# EAGLE board power (EAGLE 6.4)
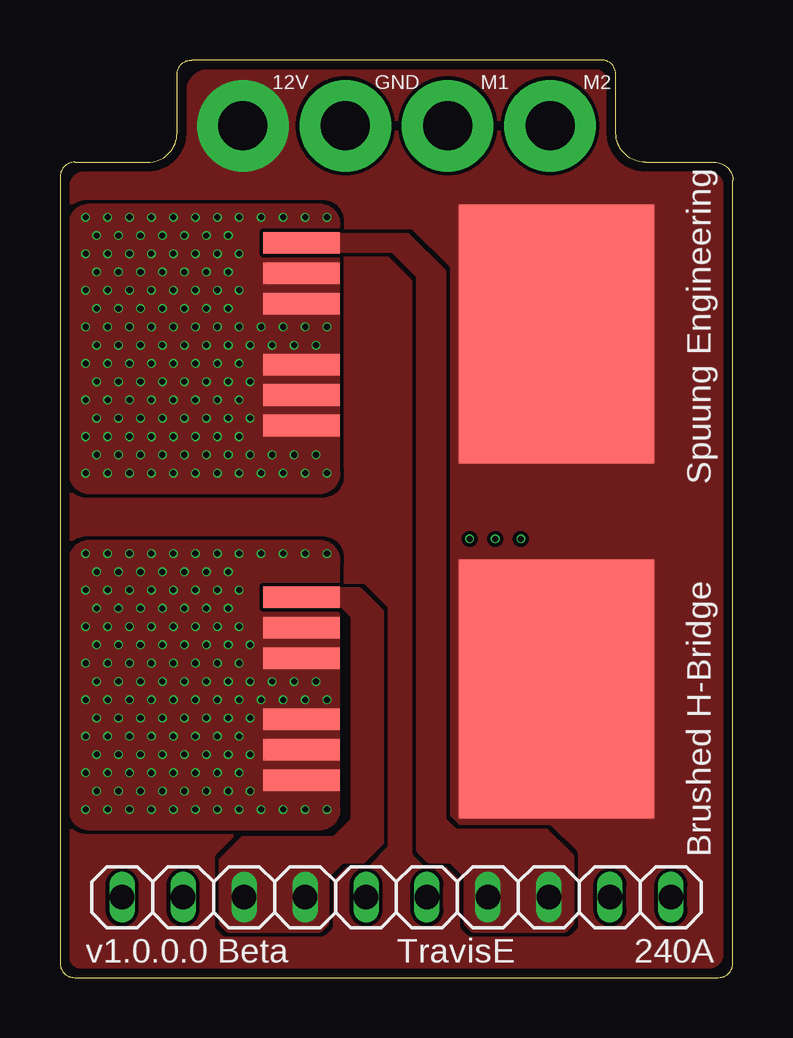
[diagram p0: board, top side]
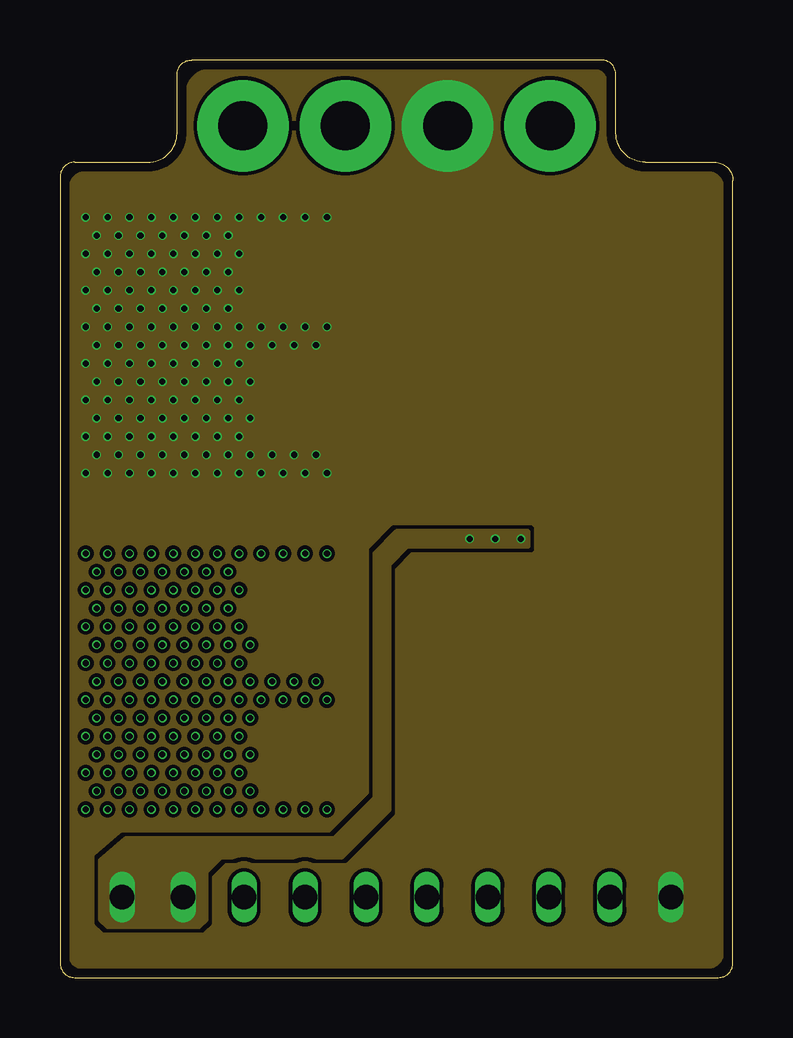
[diagram p1: board, inner layer Route2]
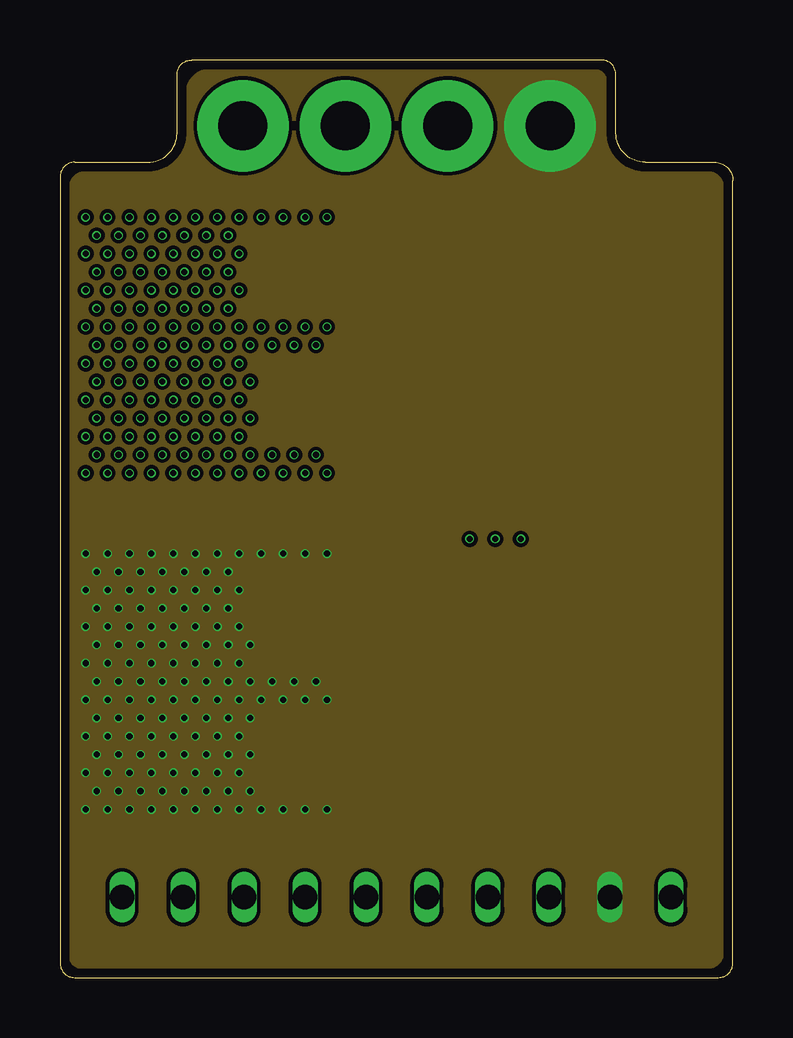
[diagram p2: board, inner layer Route3]
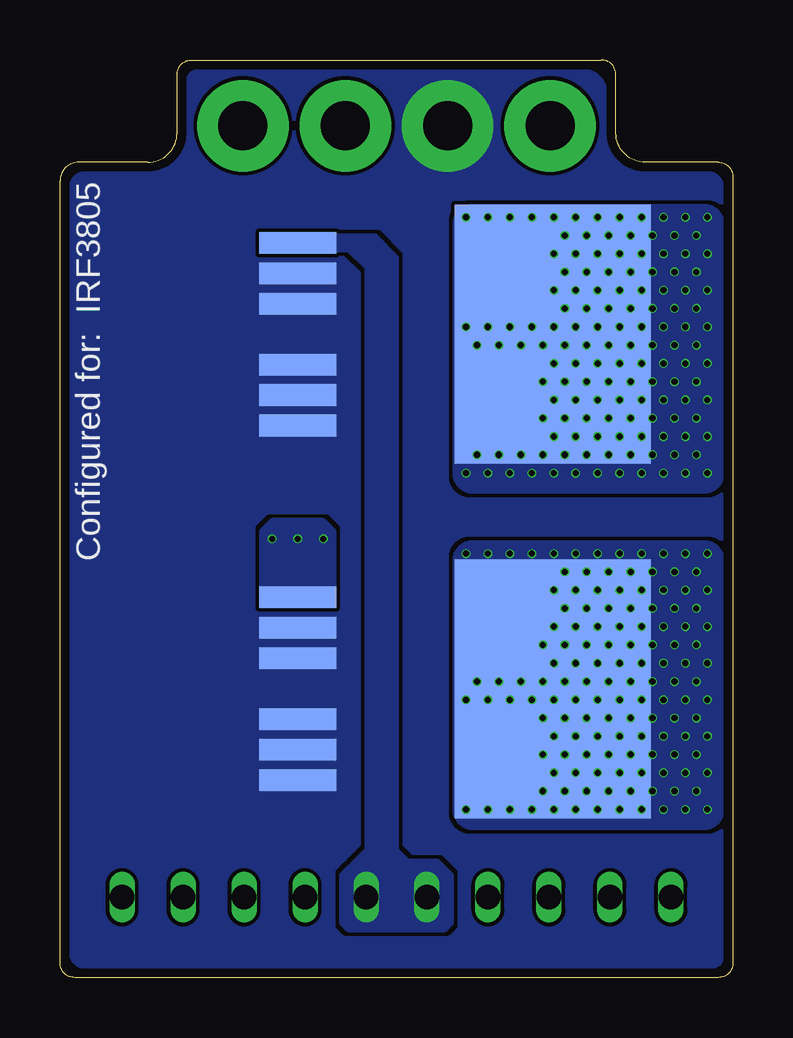
[diagram p3: board, bottom side, seen from below]

Size 28.04 x 38.25 mm. Coordinates in mm from the lower left corner, seen from the top.
Outline: 0.61,0 27.43,0 arc90 28.04,0.61 28.04,33.22 arc90 27.28,33.99 24.38,33.99 arc-90 23.17,35.2 23.17,37.64 arc90 22.56,38.25 5.49,38.25 arc90 4.88,37.64 4.88,35.2 arc-90 3.66,33.99 0.61,33.99 arc90 0,33.38 0,0.61 arc90 0.61,0
Copper layers (1*2*3*16): Top 0.035559375mm / dielectric 0.17018125mm / Route2 0.01778125mm / dielectric 47mil / Route3 0.01778125mm / dielectric 0.17018125mm / Bottom 0.035559375mm
Design rules "LaenPCBOrder *": minimum track width 5mil, minimum drill 10mil, track to track 6mil, track to pad 6mil, pad to pad 6mil, via to via 6mil, smd to smd 6mil, copper to edge 15mil, drill to drill 6mil, minimum pad ring 1mil, minimum via ring 1mil, stop-mask expansion 4mil, vias tented up to drill 13mil, thermal gap 10mil

## Footprints (pad centres in the part's own frame; a part is rotated, then mirrored left to right if it is on the bottom)
1X10 = drill 1.016 long: 1 -11.43,0; 2 -8.89,0; 3 -6.35,0; 4 -3.81,0; 5 -1.27,0; 6 1.27,0; 7 3.81,0; 8 6.35,0; 9 8.89,0; 10 11.43,0
D2PAK-7 = smd 0.9 x 3.2: 1 -3.81,0; 2 -2.54,0; 3 -1.27,0; 5 1.27,0; 6 2.54,0; 7 3.81,0 | smd 10.8 x 8.15: 8 0,10.625

## Placement (x,y rotation side)
JP1  [1X10]  14.02,3.35 0 top
U$1  IRF3805STRL-7PP  [D2PAK-7]  10.06,26.82 270 top
U$2  IRF3805STRL-7PP  [D2PAK-7]  10.06,12.04 270 top
U$3  IRF3805STRL-7PP  [D2PAK-7]  18.14,26.82 270 bottom
U$4  IRF3805STRL-7PP  [D2PAK-7]  18.14,12.04 270 bottom

## Library data of the parts
JP1 = pinhead-1
U$1-U$4 = ir-mosfets

## Nets
12V: U$1.8 U$2.8
GND: U$3.2 U$3.3 U$3.5 U$3.6 U$3.7 U$4.2 U$4.3 U$4.5 U$4.6 U$4.7
HO1: JP1.7 JP1.8 U$1.1
HO2: JP1.3 JP1.4 U$2.1
LO1: JP1.5 JP1.6 U$3.1
LO2: JP1.1 JP1.2 U$4.1
M1: JP1.10 U$1.2 U$1.3 U$1.5 U$1.6 U$1.7 U$3.8
M2: JP1.9 U$2.2 U$2.3 U$2.5 U$2.6 U$2.7 U$4.8

## Tracks (layer width: path | path; a pad name or v marks a point on that pad's centre or on a via)
12V  (via drill 2.03 pad 3.81)
  other vias: 7.62,35.51
  pour Top (rank 6, no thermals): 22.25,37.8 6.25,37.8 arc90 5.33,36.88 5.33,35.36 arc-90 3.51,33.53 1.07,33.53 arc90 0.46,32.92 0.46,0.91 arc90 0.91,0.46 26.97,0.46 arc90 27.58,1.07 27.58,32.92 arc90 26.97,33.53 24.38,33.53 arc-90 22.71,35.2 22.71,37.34 arc90
GND  (via drill 2.03 pad 3.81)
  other vias: 11.89,35.51
  pour Bottom (rank 6, no thermals): 22.25,37.8 6.25,37.8 arc90 5.33,36.88 5.33,35.36 arc-90 3.51,33.53 1.07,33.53 arc90 0.46,32.92 0.46,0.91 arc90 0.91,0.46 26.97,0.46 arc90 27.58,1.07 27.58,32.92 arc90 26.97,33.53 24.38,33.53 arc-90 22.71,35.2 22.71,37.34 arc90
HO1
  pour Top (rank 5, no thermals): 21.34,3.51 21.34,5.03 20.27,6.1 16.46,6.1 16,6.55 16,29.41 14.48,30.94 8.69,30.94 8.69,30.33 13.87,30.33 14.94,29.26 14.94,5.33 15.39,4.88 16.31,4.88 16.92,4.27 16.92,2.29 17.22,1.98 21.03,1.98 21.34,2.29
HO2
  pour Top (rank 4, no thermals): 8.69,15.54 11.73,15.54 12.19,15.09 12.19,6.55 11.43,5.79 7.62,5.79 6.71,4.88 6.71,2.29 7.01,1.98 10.82,1.98 11.13,2.29 11.13,4.27 11.73,4.88 12.65,4.88 13.41,5.64 13.41,15.24 12.5,16.15 8.69,16.15
LO1
  pour Bottom (rank 5, no thermals): 13.87,1.98 16,1.98 16.31,2.29 16.31,4.27 16,4.57 15.85,4.72 15.24,5.33 15.24,29.57 16,30.33 19.51,30.33 19.51,30.94 14.94,30.94 14.02,30.02 14.02,5.33 13.56,4.88 12.34,4.88 11.73,4.27 11.73,2.29 12.04,1.98
LO2  (via drill 0.25 pad 0.36)
  other vias: 17.07,18.29 18.14,18.29 19.2,18.29
  pour Route2 (isolate 0.61, rank 5, no thermals): 19.51,18.59 14.02,18.59 13.11,17.68 13.11,7.47 11.43,5.79 2.74,5.79 1.68,4.88 1.68,2.44 1.98,2.13 5.79,2.13 6.1,2.44 6.1,4.42 6.71,5.03 11.73,5.03 13.72,7.01 13.72,17.22 14.48,17.98 19.51,17.98
  pour Bottom (rank 5, no thermals): 16.61,15.54 16.61,18.59 17.07,19.05 19.2,19.05 19.66,18.59 19.66,15.54
M1  (via drill 0.25 pad 0.36, 2.03 pad 3.81)
  other vias: 16.15,35.51 1.07,31.7 1.98,31.7 2.9,31.7 3.81,31.7 4.72,31.7 5.64,31.7 6.55,31.7 7.47,31.7 8.38,31.7 9.3,31.7 10.21,31.7 11.13,31.7 1.52,30.94 2.44,30.94 3.35,30.94 4.27,30.94 5.18,30.94 6.1,30.94 7.01,30.94 1.07,30.18 1.98,30.18 2.9,30.18 3.81,30.18 4.72,30.18 5.64,30.18 6.55,30.18 7.47,30.18 1.52,21.79 2.44,21.79 3.35,21.79 4.27,21.79 5.18,21.79 6.1,21.79 7.01,21.79 1.07,21.03 1.98,21.03 2.9,21.03 3.81,21.03 4.72,21.03 5.64,21.03 6.55,21.03 7.47,21.03 7.92,21.79 8.84,21.79 9.75,21.79 10.67,21.79 8.38,21.03 9.3,21.03 10.21,21.03 11.13,21.03 1.52,23.32 2.44,23.32 3.35,23.32 4.27,23.32 5.18,23.32 6.1,23.32 7.01,23.32 1.07,22.56 1.98,22.56 2.9,22.56 3.81,22.56 4.72,22.56 5.64,22.56 6.55,22.56 7.47,22.56 7.92,23.32 1.52,24.84 2.44,24.84 3.35,24.84 4.27,24.84 5.18,24.84 6.1,24.84 7.01,24.84 1.07,24.08 1.98,24.08 2.9,24.08 3.81,24.08 4.72,24.08 5.64,24.08 6.55,24.08 7.47,24.08 7.92,24.84 1.52,26.37 2.44,26.37 3.35,26.37 4.27,26.37 5.18,26.37 6.1,26.37 7.01,26.37 1.07,25.6 1.98,25.6 2.9,25.6 3.81,25.6 4.72,25.6 5.64,25.6 6.55,25.6 7.47,25.6 7.92,26.37 8.84,26.37 9.75,26.37 10.67,26.37 1.52,27.89 2.44,27.89 3.35,27.89 4.27,27.89 5.18,27.89 6.1,27.89 7.01,27.89 1.07,27.13 1.98,27.13 2.9,27.13 3.81,27.13 4.72,27.13 5.64,27.13 6.55,27.13 7.47,27.13 8.38,27.13 9.3,27.13 10.21,27.13 11.13,27.13 1.52,29.41 2.44,29.41 3.35,29.41 4.27,29.41 5.18,29.41 6.1,29.41 7.01,29.41 1.07,28.65 1.98,28.65 2.9,28.65 3.81,28.65 4.72,28.65 5.64,28.65 6.55,28.65 7.47,28.65
  pour Top (rank 5, no thermals): 10.82,32.16 1.22,32.16 arc90 0.46,31.39 0.46,21.03 arc90 1.22,20.27 10.82,20.27 arc90 11.58,21.03 11.58,31.39 arc90
  pour Bottom (rank 5, no thermals): 10.82,32.16 1.22,32.16 arc90 0.46,31.39 0.46,21.03 arc90 1.22,20.27 10.82,20.27 arc90 11.58,21.03 11.58,31.39 arc90
  pour Route2 (rank 6, no thermals): 22.25,37.8 6.25,37.8 arc90 5.33,36.88 5.33,35.36 arc-90 3.51,33.53 1.07,33.53 arc90 0.46,32.92 0.46,0.91 arc90 0.91,0.46 26.97,0.46 arc90 27.58,1.07 27.58,32.92 arc90 26.97,33.53 24.38,33.53 arc-90 22.71,35.2 22.71,37.34 arc90
M2  (via drill 0.25 pad 0.36, 2.03 pad 3.81)
  other vias: 1.07,17.68 1.98,17.68 2.9,17.68 3.81,17.68 4.72,17.68 5.64,17.68 6.55,17.68 7.47,17.68 8.38,17.68 9.3,17.68 10.21,17.68 11.13,17.68 1.52,16.92 2.44,16.92 3.35,16.92 4.27,16.92 5.18,16.92 6.1,16.92 7.01,16.92 1.07,16.15 1.98,16.15 2.9,16.15 3.81,16.15 4.72,16.15 5.64,16.15 6.55,16.15 7.47,16.15 1.52,7.77 2.44,7.77 3.35,7.77 4.27,7.77 5.18,7.77 6.1,7.77 7.01,7.77 1.07,7.01 1.98,7.01 2.9,7.01 3.81,7.01 4.72,7.01 5.64,7.01 6.55,7.01 7.47,7.01 1.52,9.3 2.44,9.3 3.35,9.3 4.27,9.3 5.18,9.3 6.1,9.3 7.01,9.3 1.07,8.53 1.98,8.53 2.9,8.53 3.81,8.53 4.72,8.53 5.64,8.53 6.55,8.53 7.47,8.53 1.52,10.82 2.44,10.82 3.35,10.82 4.27,10.82 5.18,10.82 6.1,10.82 7.01,10.82 1.07,10.06 1.98,10.06 2.9,10.06 3.81,10.06 4.72,10.06 5.64,10.06 6.55,10.06 7.47,10.06 1.52,12.34 2.44,12.34 3.35,12.34 4.27,12.34 5.18,12.34 6.1,12.34 7.01,12.34 1.07,11.58 1.98,11.58 2.9,11.58 3.81,11.58 4.72,11.58 5.64,11.58 6.55,11.58 7.47,11.58 1.52,13.87 2.44,13.87 3.35,13.87 4.27,13.87 5.18,13.87 6.1,13.87 7.01,13.87 1.07,13.11 1.98,13.11 2.9,13.11 3.81,13.11 4.72,13.11 5.64,13.11 6.55,13.11 7.47,13.11 1.52,15.39 2.44,15.39 3.35,15.39 4.27,15.39 5.18,15.39 6.1,15.39 7.01,15.39 1.07,14.63 1.98,14.63 2.9,14.63 3.81,14.63 4.72,14.63 5.64,14.63 6.55,14.63 7.47,14.63 7.92,12.34 8.84,12.34 9.75,12.34 10.67,12.34 8.38,11.58 7.92,13.87 9.3,11.58 10.21,11.58 11.13,11.58 7.92,10.82 7.92,9.3 7.92,7.77 8.38,7.01 9.3,7.01 10.21,7.01 11.13,7.01 20.42,35.51
  pour Top (rank 5, no thermals): 10.82,18.14 1.22,18.14 arc90 0.46,17.37 0.46,7.01 arc90 1.22,6.25 10.82,6.25 arc90 11.58,7.01 11.58,17.37 arc90
  pour Bottom (rank 5, no thermals): 10.82,18.14 1.22,18.14 arc90 0.46,17.37 0.46,7.01 arc90 1.22,6.25 10.82,6.25 arc90 11.58,7.01 11.58,17.37 arc90
  pour Route3 (rank 6, no thermals): 22.25,37.8 6.25,37.8 arc90 5.33,36.88 5.33,35.36 arc-90 3.51,33.53 1.07,33.53 arc90 0.46,32.92 0.46,0.91 arc90 0.91,0.46 26.97,0.46 arc90 27.58,1.07 27.58,32.92 arc90 26.97,33.53 24.38,33.53 arc-90 22.71,35.2 22.71,37.34 arc90

## Text on the board
tPlace: 12V | GND | M1 | M2 | Spuung Engineering | Brushed H-Bridge | v1.0.0.0 Beta | TravisE | 240A
bPlace: Configured for: IRF3805
Document: Layer Info | TOP: GND | RT2 : GND | RT3: +12V | BTM: GND